# Altium PCB bottom_board.PcbDoc
Units mm, origin at the board's own origin, x right, y up, seen from the top; angles counter-clockwise.
Board outline 109 x 70 mm, 4 copper layers (Top Layer, +12V, -12V, Bottom Layer), stack 0.603 mm thick; 56 components, 37 nets, 188 pads, 33 vias.
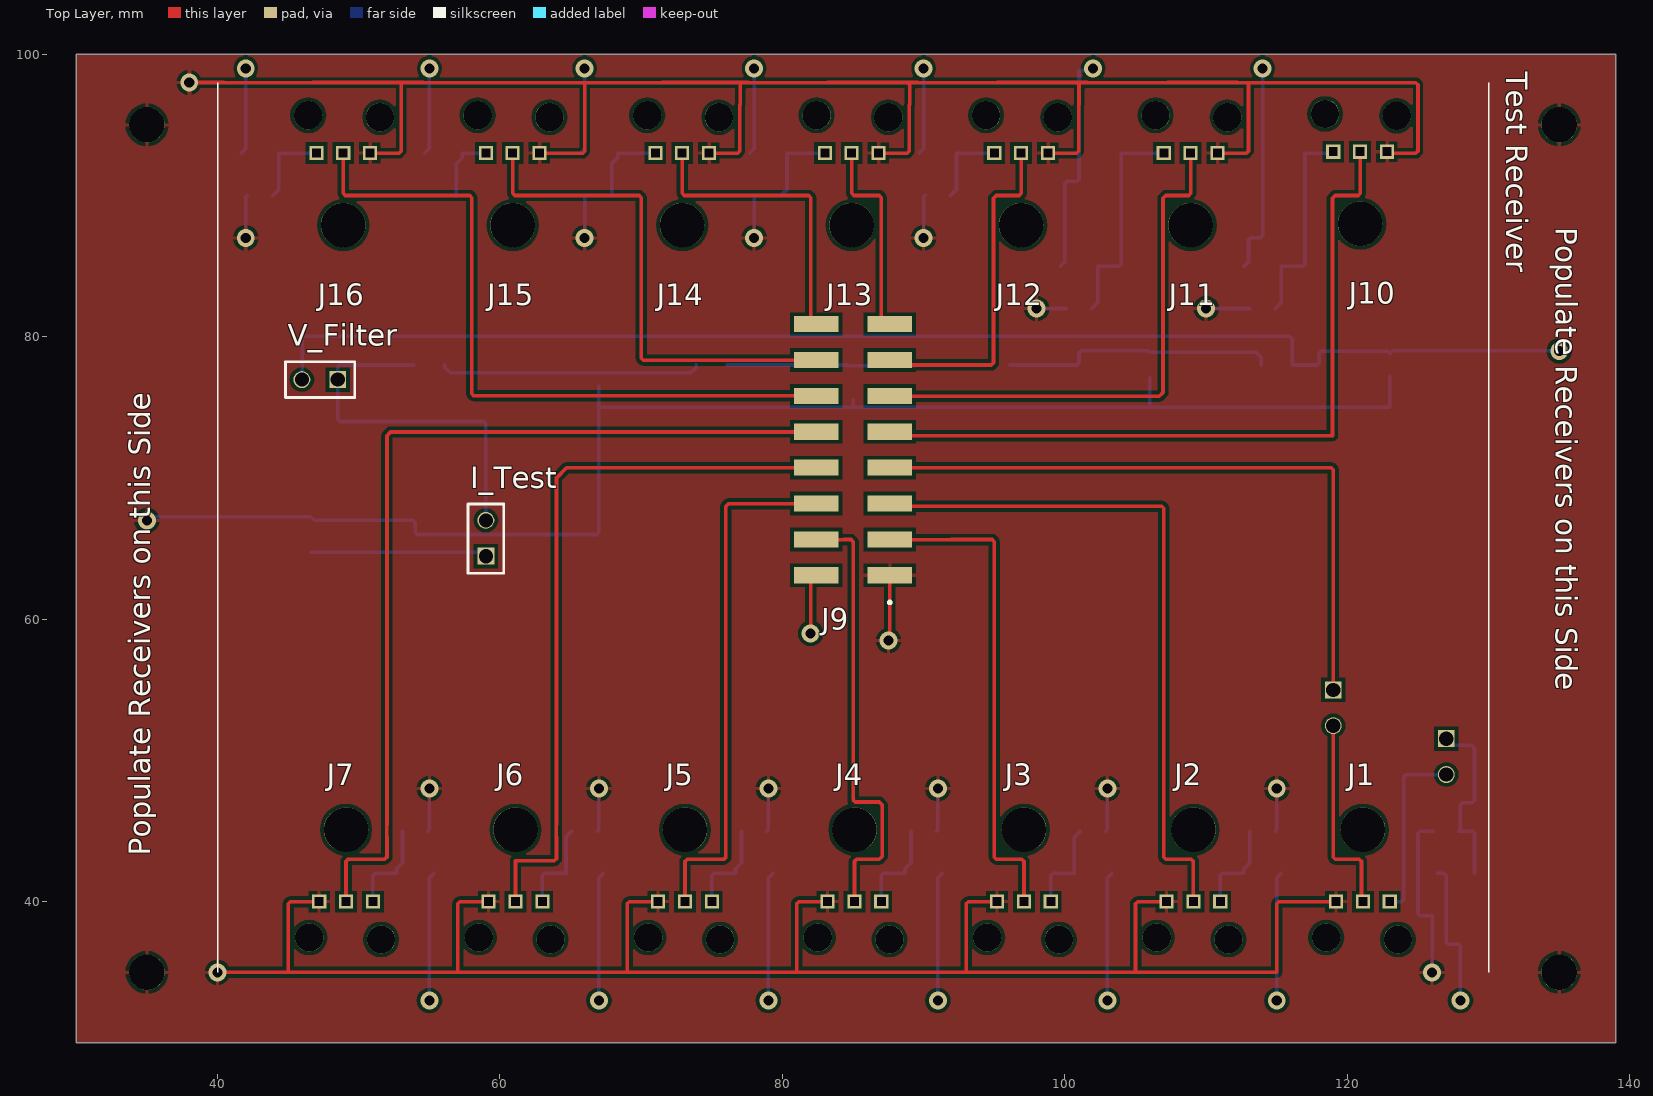
[diagram p0: Top Layer view]
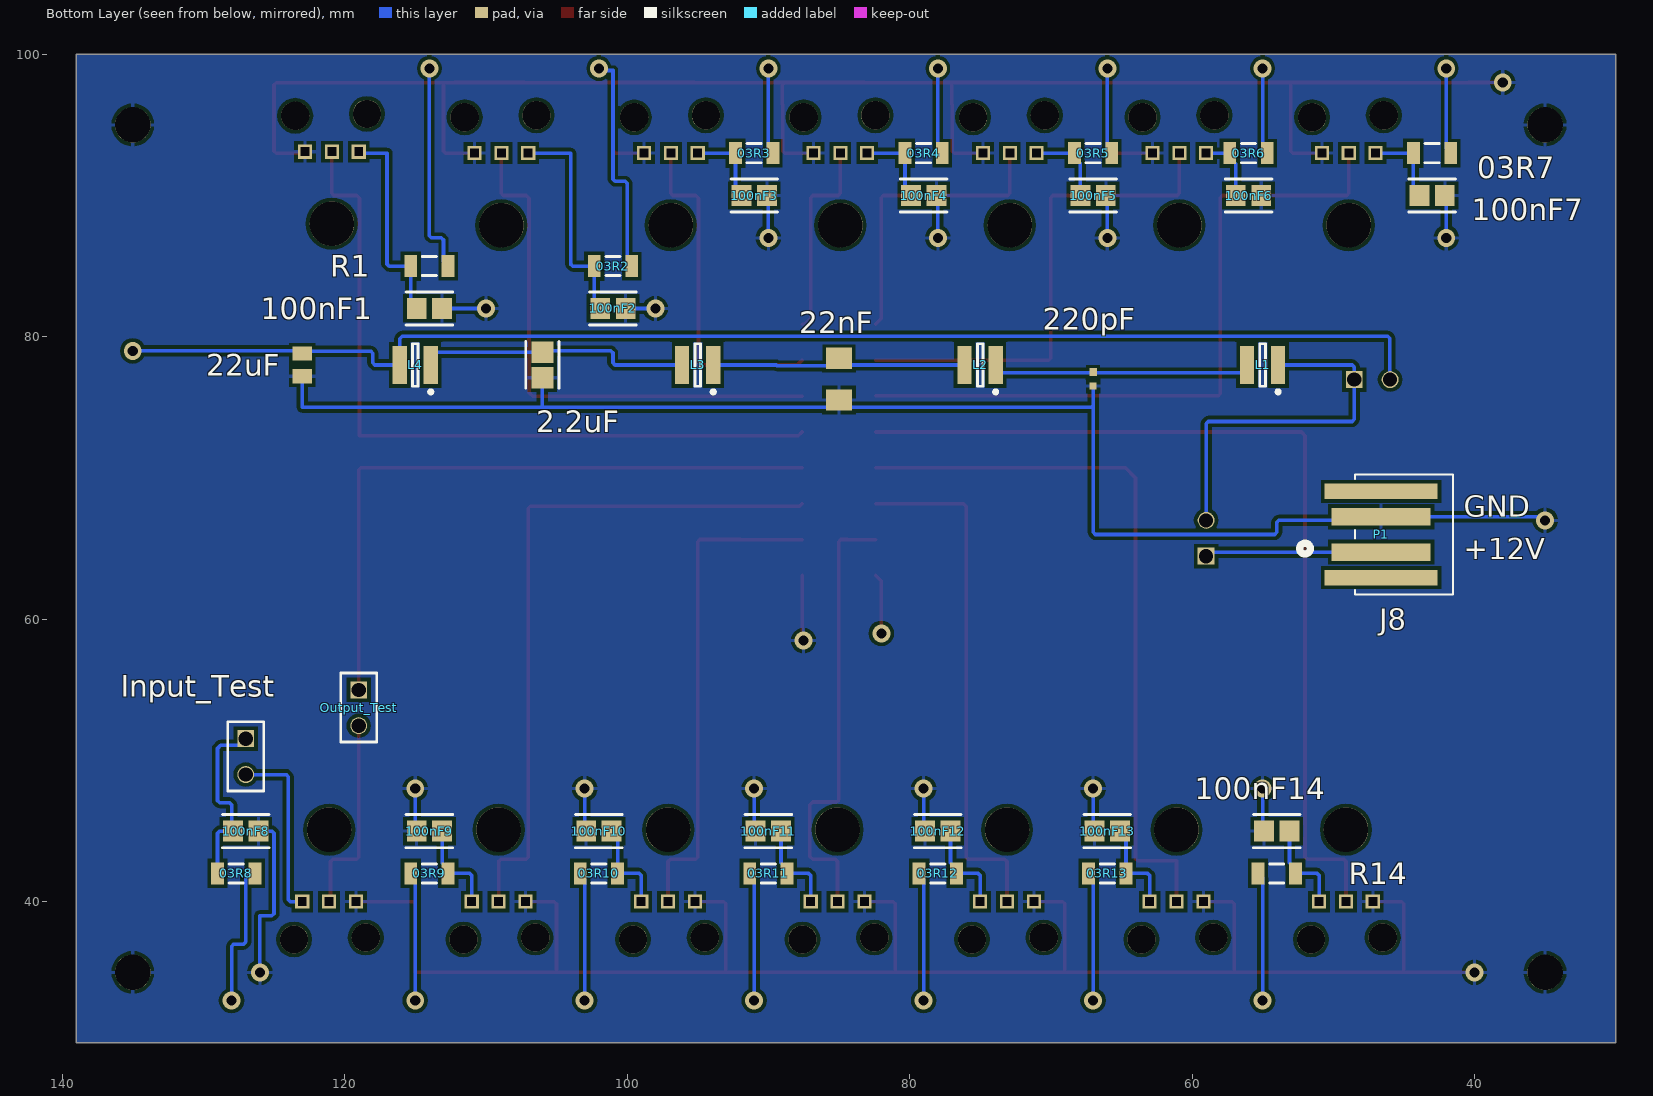
[diagram p1: Bottom Layer view, seen from below]
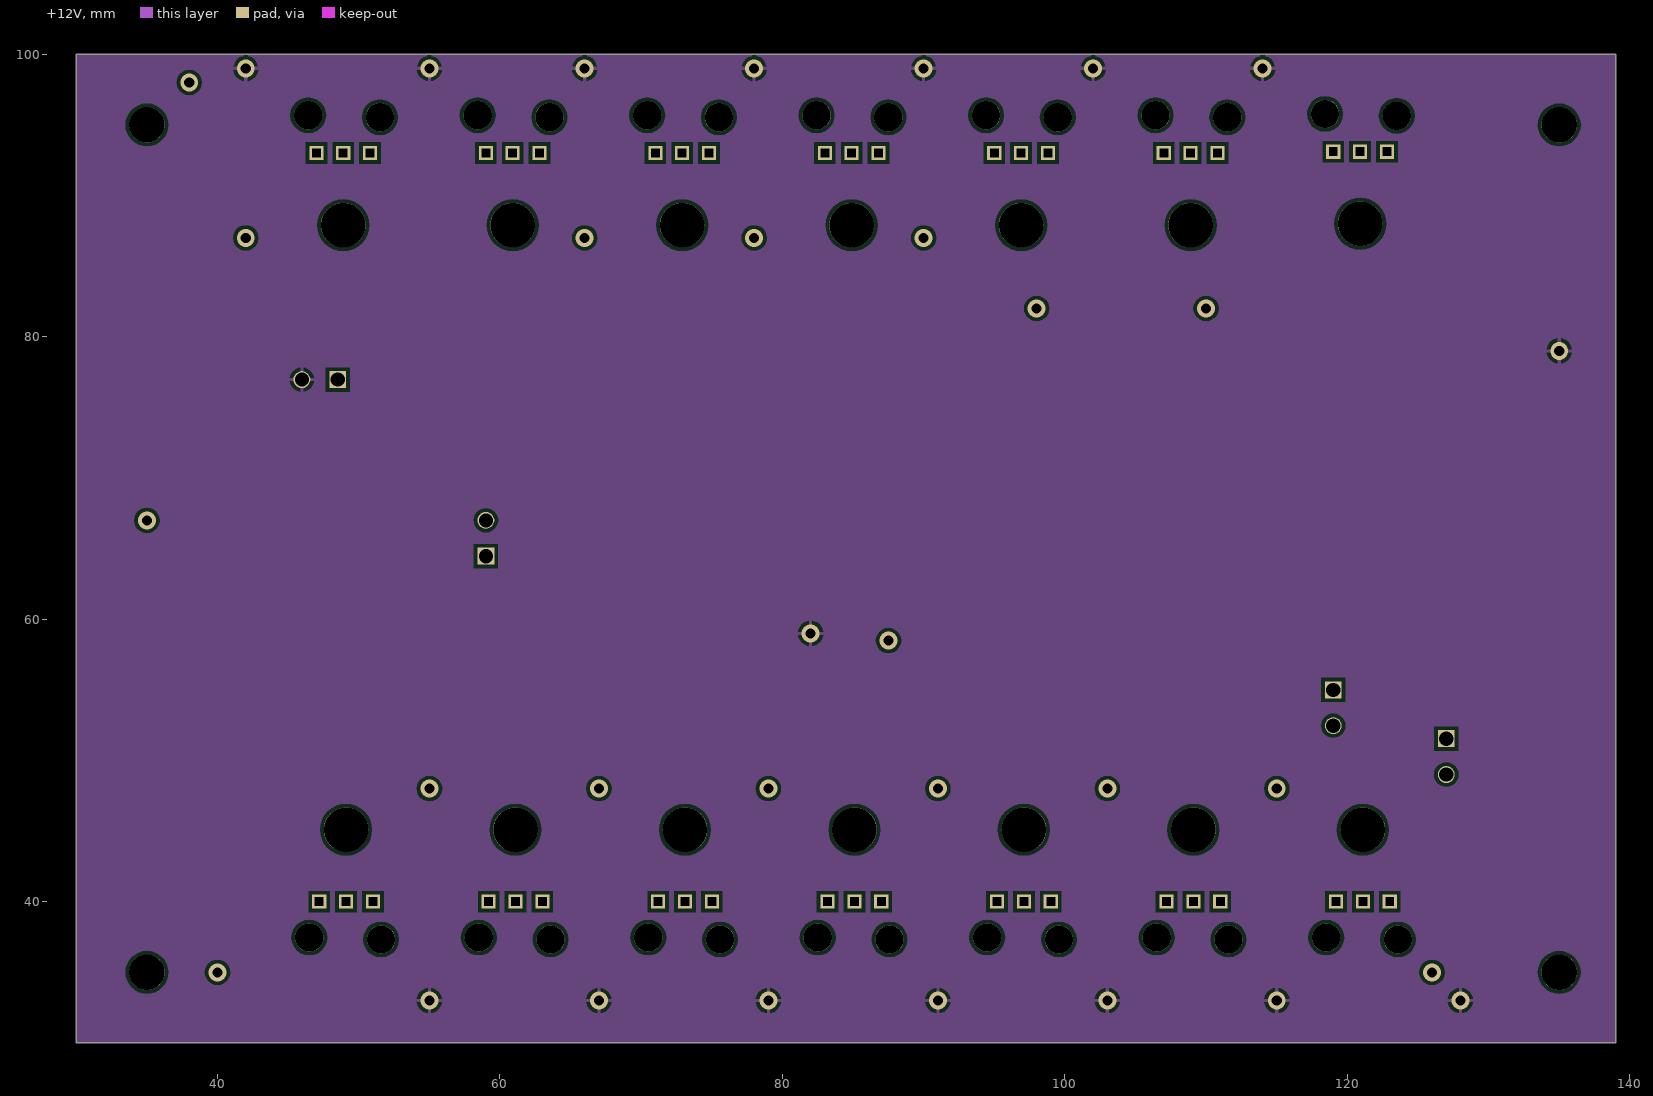
[diagram p2: +12V]
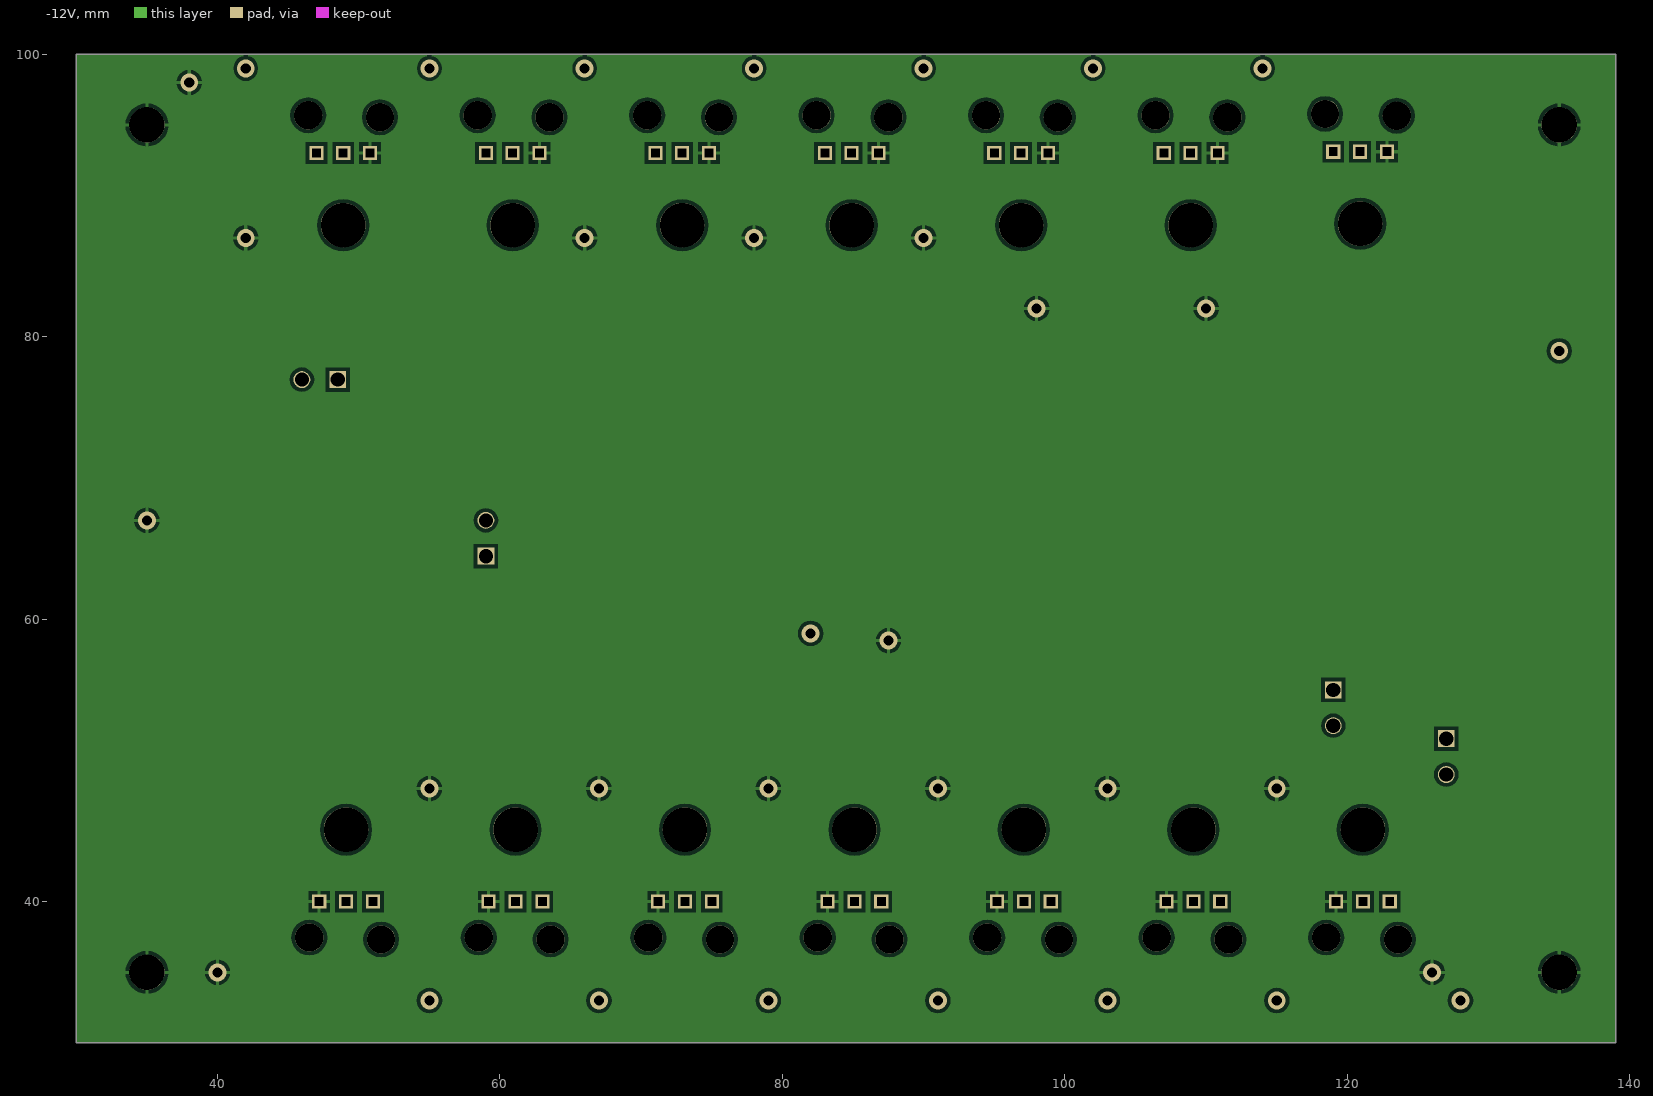
[diagram p3: -12V]
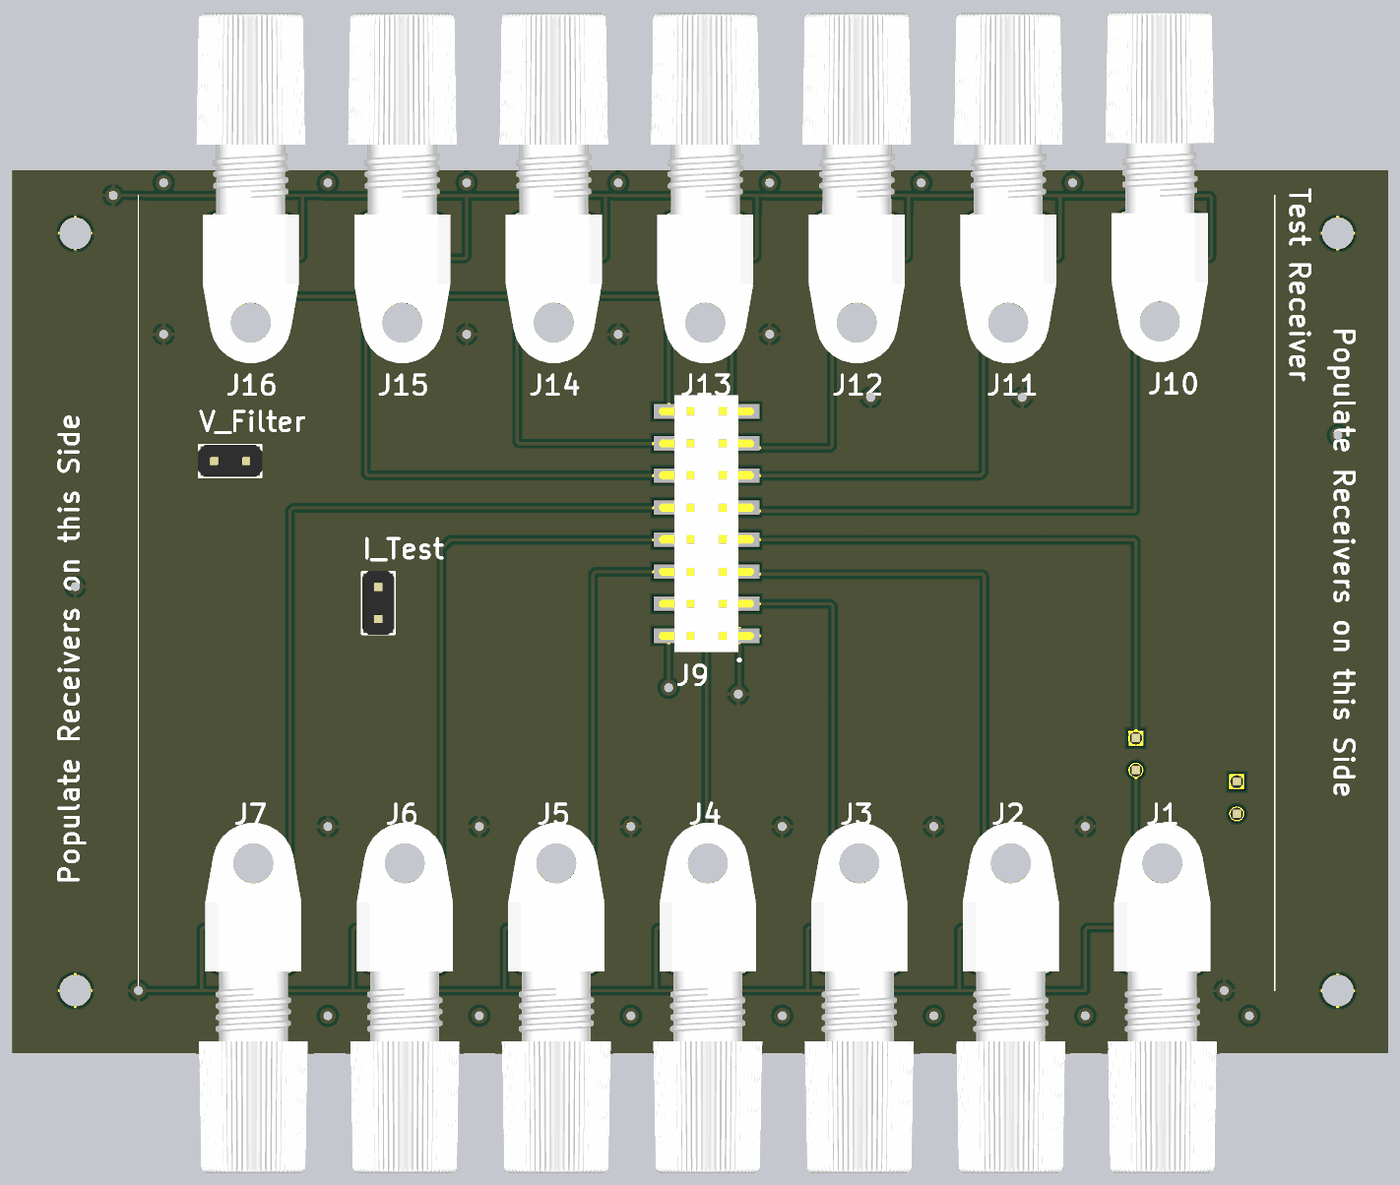
[diagram p4: 3D render of the assembled board from above, using the file's embedded part models]

## Layer stack, top to bottom
Top Solder: solder mask 0.0102, Solder Resist, Dk 3.5
Top Layer: signal copper 0.035
Dielectric 2: prepreg 0.0711, PP-006, Dk 4.1
+12V: signal copper 0.0356
Dielectric 1: dielectric 0.32, FR-4, Dk 4.8
-12V: signal copper 0.0356
Dielectric 3: prepreg 0.0711, PP-006, Dk 4.1
Bottom Layer: signal copper 0.035
Bottom Solder: solder mask 0.0102, Solder Resist, Dk 3.5

## Board outline
30,30 30,100 139,100 139,30

## Design rules (kind name [scope] priority, off if disabled: settings)
Clearance [All] p1: gap=0.254 ignorepadtopadclearanceinfootprint=FALSE except(0: Arc-Hole Track-Hole SMDPad-Hole THPad-Hole Via-Hole Fill-Hole Poly-Hole Region-Hole Text-Hole)
HoleSize [All] p1: absolutevalues=TRUE maxlimit=4 minlimit=0.025 maxpercent=80.000 minpercent=20.000
PolygonConnect [All] p1: connectstyle=Relief reliefconductorwidth=0.254 reliefentries=4 polygonreliefangle="90 Angle" airgapwidth=0.254
RoomDefinition bot_schem [InComponentClass('bot_schem')] p1: confinementstyle=ConfineIn formatcopy=TRUE lockcomponents=FALSE outline 30,17 139,17 139,117 30,117
RoutingVias [All] p1: holewidth=0.711 width=1.27 viastyle="Through Hole" minholewidth=0.711 minwidth=1.27 maxholewidth=0.711 maxwidth=1.27
SolderMaskExpansion [All] p1: expansion=0.102 istentingtop=FALSE
Width [All] p1: maxlimit=0.254 minlimit=0.254 preferedwidth=0.254
29 further rules are at their usual default settings.

## Components (designator, comment, footprint, x,y, rotation, side; value= is the part's Value field where it differs from the comment)
2.2uF "C0805C223K5RACTU" 22nF#1 106,78 r270 bottom
03R2 "ERJ-2BQJR30X" "03 Ohm" 101,85 r0 bottom
03R3 "ERJ-2BQJR30X" "03 Ohm" 91,93 r0 bottom
03R4 "ERJ-2BQJR30X" "03 Ohm" 79,93 r0 bottom
03R5 "ERJ-2BQJR30X" "03 Ohm" 67,93 r0 bottom
03R6 "ERJ-2BQJR30X" "03 Ohm" 56,93 r0 bottom
03R7 "ERJ-2BQJR30X" "03 Ohm" 43,93 r0 bottom
03R8 "ERJ-2BQJR30X" "03 Ohm" 127.675,42 r0 bottom
03R9 "ERJ-2BQJR30X" "03 Ohm" 114,42 r180 bottom
03R10 "ERJ-2BQJR30X" "03 Ohm" 102,42 r180 bottom
03R11 "ERJ-2BQJR30X" "03 Ohm" 90,42 r180 bottom
03R12 "ERJ-2BQJR30X" "03 Ohm" 78,42 r180 bottom
03R13 "ERJ-2BQJR30X" "03 Ohm" 66,42 r180 bottom
22nF "GRM3195C1H223JA01" 22nF#2 85,77 r270 bottom
22uF "C0805C226M9PACTU" 22uF 123,78 r270 bottom
100nF1 "C0805C104K5RACTU" 100nF 114,82 r0 bottom
100nF2 "C0805C104K5RACTU" 100nF 101,82 r0 bottom
100nF3 "C0805C104K5RACTU" 100nF 91,90 r0 bottom
100nF4 "C0805C104K5RACTU" 100nF 79,90 r0 bottom
100nF5 "C0805C104K5RACTU" 100nF 67,90 r0 bottom
100nF6 "C0805C104K5RACTU" 100nF 56,90 r0 bottom
100nF7 "C0805C104K5RACTU" 100nF 43,90 r0 bottom
100nF8 "C0805C104K5RACTU" 100nF 127,45 r180 bottom
100nF9 "C0805C104K5RACTU" 100nF 114,45 r0 bottom
100nF10 "C0805C104K5RACTU" 100nF 102,45 r0 bottom
100nF11 "C0805C104K5RACTU" 100nF 90,45 r0 bottom
100nF12 "C0805C104K5RACTU" 100nF 78,45 r0 bottom
100nF13 "C0805C104K5RACTU" 100nF 66,45 r0 bottom
100nF14 "C0805C104K5RACTU" 100nF 54,45 r0 bottom
220pF "GRM1555C1H221JA01" 220pF 67,77 r270 bottom
I_Test "PRPC001DFAN-RC" PRPC001DFAN-RC 59,64.46 r90 top
Input_Test "PRPC001DFAN-RC" PRPC001DFAN-RC 127,51.54 r270 bottom
J1 "IF-D95T" IF-D95 123,40 r180 top
J2 "IF-D95T" IF-D95 111,40 r180 top
J3 "IF-D95T" IF-D95 99,40 r180 top
J4 "IF-D95T" IF-D95 87,40 r180 top
J5 "IF-D95T" IF-D95 75,40 r180 top
J6 "IF-D95T" IF-D95 63,40 r180 top
J7 "IF-D95T" IF-D95 51,40 r180 top
J9 "HW-08-11-F-D-511-SM" "16 pin receiver" 85,72 r90 top
J10 "IF-D95T" IF-D95 119,93.1 r0 top
J11 "IF-D95T" IF-D95 107,93 r0 top
J12 "IF-D95T" IF-D95 95,93 r0 top
J13 "IF-D95T" IF-D95 83,93 r0 top
J14 "IF-D95T" IF-D95 71,93 r0 top
J15 "IF-D95T" IF-D95 59,93 r0 top
J16 "IF-D95T" IF-D95 47,93 r0 top
L1 "SRN3015-1R0Y" 1uH 55,78 r0 bottom
L2 "SRN3015-1R0Y" 1uH 75,78 r0 bottom
L3 "SRN3015-1R0Y" 1uH 95,78 r0 bottom
L4 "SRN3015-1R0Y" 1uH 115,78 r0 bottom
Output_Test "PRPC001DFAN-RC" PRPC001DFAN-RC 119,55 r270 bottom
P1 "1054311102" CONN_1054311102_MOL 45,66 r270 bottom
R1 "ERJ-2BQJR30X" "03 Ohm" 114,85 r0 bottom
R14 "ERJ-2BQJR30X" "03 Ohm" 54,42 r180 bottom
V_Filter "PRPC001DFAN-RC" PRPC001DFAN-RC 48.514,76.962 r180 top (schematic designator V_Filter?)

## Footprints (in the part's own frame and the unit in brackets; to place one, negate y for a bottom-side part, rotate by r counter-clockwise, add the part's x,y. Pads: shape width x height; smd on the part's side, far side on the other; paste and mask are expansions set on the pad)
1uH [mm]
  rect 1x2.7 smd: 1(-1.1,0) 2(1.1,0)
  silkscreen extent -1.22,-1.5 0.2,2.02, body extent -1.5,-1.5 1.5,1.5, height 1.5
"03 Ohm" [mm]
  rect 0.9x1.55 smd: 1(-1.325,0) 2(1.325,0)
  silkscreen extent -0.5,-0.67 0.5,0.67, body extent -1.63,-0.82 1.62,0.82, height 0.7
"16 pin receiver" [mm]
  rect 1.14x3.175 smd: 01(-8.89,-2.602) 02(-8.89,2.603) 03(-6.35,-2.602) 04(-6.35,2.603) 05(-3.81,-2.602) 06(-3.81,2.603) 07(-1.27,-2.602) 08(-1.27,2.603) 09(1.27,-2.602) 10(1.27,2.603) 11(3.81,-2.602) 12(3.81,2.603) 13(6.35,-2.602) 14(6.35,2.603) 15(8.89,-2.602) 16(8.89,2.603)
  silkscreen extent -10.91,-2.7 -10.71,-2.5, body extent -10.16,-3.75 10.16,3.75, height 21.98
22nF#1 [mm]
  rect 1.505x1.556 smd paste+0 mask+0: 1(-0.901,0) 2(0.901,0)
  silkscreen extent -1.65,-1.18 1.65,1.18, body extent -1,-0.63 1,0.62, height 0.88
22nF#2 [mm]
  rect 1.506x1.858 smd paste+0 mask+0: 1(-1.476,0) 2(1.476,0)
  body extent -1.6,-0.8 1.6,0.8, height 0.95
22uF [mm]
  rect 1x1.35 smd: 1(-0.8,0) 2(0.8,0)
  body extent -1.1,-0.72 1.1,0.72, height 1.45
100nF [mil]
  rect 55x58 smd paste+0 mask+0: 1(-35.46,0) 2(35.46,0)
  silkscreen extent -65,-46 65,46, body extent -39,-25 39,25, height 35
220pF [mm]
  rect 0.56x0.52 smd: 1(-0.5,0)
  rect 0.5x0.5 smd: 2(0.5,0)
  body extent -0.53,-0.28 0.53,0.28, height 0.55
CONN_1054311102_MOL [mil]
  rect 49x276 smd paste+0 mask+0: 1(49.21,-63.38) 2(-49.21,-63.38)
  rect 43x315 smd: 3(-120.28,-63.38) 4(120.28,-63.38)
  silkscreen extent -167,-137 167,137, body extent -162,-254 162,71, height 440
IF-D95 [mm]
  rect 1x1 hole 0.6 square: 1(0,0) 2(1.9,0) 3(3.8,0)
  round 2 hole 2: 4(-0.58,2.675) 4(4.5,2.54)
  round 3.15 hole 3.15: 4(1.9,-5.1)
  body extent -2.42,-8.3 6.22,19.44, height 11.3
PRPC001DFAN-RC [mm]
  rect 1.2x1.2 hole 1: 1(0,0)
  round 1.2 hole 1: 2(2.54,0)
  silkscreen extent -1.2,-1.27 3.7,1.27, body extent -1.29,-1.27 3.79,1.27, height 10.17

## Part data
2.2uF: "KEMET - C0805C223K5RACTU - CAP, MLCC, X7R, 22NF, 50V, 0805", Capacitance=22nF, Case Code (Imperial)=0805, Case Code (Metric)=2012, Dielectric=X7R, Dielectric Material=Ceramic, Manufacturer=KEMET, Max Operating Temperature=125°C, Min Operating Temperature=-55°C, Supplier Part Number 1=399-1163-1-ND, Tolerance=10%, Voltage=50V, Case/Package=0805, Category="Ceramic Capacitors", ComponentLink1Description=https://datasheet.ciiva.com/18193/getdatasheetpartid-385695-18193669.pdf?src-supplier=Verical, ComponentLink1URL=https://datasheet.ciiva.com/18193/getdatasheetpartid-385695-18193669.pdf?src-supplier=Verical, Construction=Flat, Depth=1.25mm, Height=0.78mm, Length=2mm, Manufacturer Part Number=C0805C223K5RACTU, Mount="Surface Mount,PCB", Packaging="Tape and Reel", Pricing 1="1=0.10000, 10=0.05200, 50=0.02840, 100=0.02320, 500=0.01656, 1000=0.01301 (USD)", Radiation Hardening=No, REACH SVHC="No SVHC", RoHS=Yes, RoHS Compliant=Yes, Series=C0805C, Stock 1=179680, Supplier 1=Digi-Key, Termination=SMD/SMT, Voltage Rating=50V, Voltage Rating (DC)=50V, Weight=0.000194oz, Width=1.2mm
03R2 03R3 03R4 03R5 03R6 03R7 03R8 03R9 03R10 03R11 03R12 03R13 R1 R14: "RES 0.3 OHM 5% 1/6W 0402", Case Code (Imperial)=0402, Case Code (Metric)=1005, Manufacturer=Panasonic, Max Operating Temperature=125°C, Max Power Dissipation=167mW, Min Operating Temperature=-55°C, Resistance=300mR, Resistor Type="Thick Film", Supplier Part Number 1=P17347CT-ND, Temperature Coefficient=250ppm/°C, Tolerance=5%, Case/Package=0402, Category="Chip SMD Resistors", ComponentLink1Description=http://www.mouser.com/ds/2/315/AOA0000C295-1109214.pdf?src-supplier=Mouser, ComponentLink1URL=http://www.mouser.com/ds/2/315/AOA0000C295-1109214.pdf?src-supplier=Mouser, ComponentLink2Description=https://industrial.panasonic.com/cdbs/www-data/pdf/RDN0000/AOA0000C313.pdf?src-supplier=Digi-Key, ComponentLink2URL=https://industrial.panasonic.com/cdbs/www-data/pdf/RDN0000/AOA0000C313.pdf?src-supplier=Digi-Key, Features="Automotive AEC-Q200", Height=0.016inch, Length=0.039inch, Manufacturer Part Number=ERJ-2BQJR30X, Number of Terminations=2, Packaging="Tape and Reel", Pricing 1="1=0.21000, 10=0.17600, 25=0.12800, 50=0.09280, 100=0.06880, 250=0.05280, 500=0.04160, 1000=0.02880, 5000=0.02400 (USD)", RoHS=Yes, Stock 1=18282, Supplier 1=Digi-Key, Width=0.02inch
22nF: "MURATA - GRM3195C1H223JA01 - CAP", Capacitance=22nF, Case Code (Imperial)=0805, Case Code (Metric)=2012, Dielectric=X7R, Dielectric Material=Ceramic, Manufacturer=KEMET, Manufacturer Part Number=C0805C223K5RACTU, Max Operating Temperature=125°C, Min Operating Temperature=-55°C, Supplier Part Number 1=490-1761-1-ND, Tolerance=10%, Voltage=50V, Case/Package=0805, Category="Ceramic Capacitors", ComponentLink1Description=https://datasheet.ciiva.com/18193/getdatasheetpartid-385695-18193669.pdf?src-supplier=Verical, ComponentLink1URL=https://datasheet.ciiva.com/18193/getdatasheetpartid-385695-18193669.pdf?src-supplier=Verical, Construction=Flat, Depth=1.25mm, Height=0.78mm, Length=2mm, Mount="Surface Mount,PCB", Packaging="Tape and Reel", Pricing 1="1=0.10000, 10=0.05200, 50=0.02840, 100=0.02320, 500=0.01656, 1000=0.01301 (USD)", Radiation Hardening=No, REACH SVHC="No SVHC", RoHS=Yes, RoHS Compliant=Yes, Series=C0805C, Stock 1=179680, Supplier 1=Digi-Key, Termination=SMD/SMT, Voltage Rating=50V, Voltage Rating (DC)=50V, Weight=0.000194oz, Width=1.2mm
22uF: "KEMET         C0805C226M9PACTU            CERAMIC CAPACITOR, 22UF, 6.3V, X5R, 20%, 0805, FULL REEL", Capacitance=22uF, Case Code (Imperial)=0805, Case Code (Metric)=2012, Dielectric=X5R, Dielectric Material=Ceramic, Manufacturer=KEMET, Max Operating Temperature=85°C, Min Operating Temperature=-55°C, Package Quantity=2500, Supplier Part Number 1=399-4696-1-ND, Tolerance=20%, Voltage=6.3V, Case/Package=0805, Category="Ceramic Capacitors", ComponentLink1Description=https://datasheet.ciiva.com/7842/40889-7842585.pdf?src-supplier=Element14, ComponentLink1URL=https://datasheet.ciiva.com/7842/40889-7842585.pdf?src-supplier=Element14, ComponentLink2Description=https://datasheet.ciiva.com/18193/getdatasheetpartid-344134-18193702.pdf?src-supplier=Verical, ComponentLink2URL=https://datasheet.ciiva.com/18193/getdatasheetpartid-344134-18193702.pdf?src-supplier=Verical, ComponentLink3Description=https://datasheet.ciiva.com/22748/1918694-22748303.pdf?src-supplier=Element14, ComponentLink3URL=https://datasheet.ciiva.com/22748/1918694-22748303.pdf?src-supplier=Element14, Construction=Flat, Depth=1.25mm, Dissipation Factor=5%, Height=1.25mm, Lead Free="Lead Free", Length=2mm, Manufacturer Part Number=C0805C226M9PACTU, Mount="Surface Mount,PCB", Number of Pins=2, Packaging="Tape and Reel", Pricing 1="1=0.21000, 10=0.14400, 50=0.08660, 100=0.07320, 500=0.05004, 1000=0.04428 (USD)", Radiation Hardening=No, REACH SVHC="No SVHC", RoHS=Yes, RoHS Compliant=Yes, Stock 1=337605, Supplier 1=Digi-Key, Termination=SMD/SMT, Voltage Rating=6.3V, Voltage Rating (DC)=6.3V, Width=1.2mm
100nF1 100nF2 100nF3 100nF4 100nF5 100nF6 100nF7 100nF8 100nF9 100nF10 100nF11 100nF12 100nF13 100nF14: "Cap Ceramic 0.1uF 50V X7R 10% SMD 2.0 x 1.2 mm 125 C Paper T/R", Capacitance=100nF, Case Code (Imperial)=0805, Case Code (Metric)=2012, Dielectric=X7R, Dielectric Material=Ceramic, Manufacturer=KEMET, Max Operating Temperature=125°C, Min Operating Temperature=-55°C, Package Quantity=4000, Supplier Part Number 1=399-1170-1-ND, Tolerance=10%, Voltage=500V, Voltage Rating=50V, Case/Package=0805, Category="Ceramic Capacitors", ComponentLink1Description=https://datasheet.ciiva.com/28682/1851736-28682232.pdf?src-supplier=Element14, ComponentLink1URL=https://datasheet.ciiva.com/28682/1851736-28682232.pdf?src-supplier=Element14, ComponentLink2Description=https://datasheet.ciiva.com/14589/70095383-14589048.pdf?src-supplier=Allied+Electronics, ComponentLink2URL=https://datasheet.ciiva.com/14589/70095383-14589048.pdf?src-supplier=Allied+Electronics, ComponentLink3Description=https://datasheet.ciiva.com/32431/slceramic-chip-condensers-e-32431755.pdf?src-supplier=Distrelec, ComponentLink3URL=https://datasheet.ciiva.com/32431/slceramic-chip-condensers-e-32431755.pdf?src-supplier=Distrelec, ComponentLink4Description=https://datasheet.ciiva.com/18410/70095383-18410815.pdf?src-supplier=Allied+Electronics, ComponentLink4URL=https://datasheet.ciiva.com/18410/70095383-18410815.pdf?src-supplier=Allied+Electronics, Construction=Flat, Contact Plating=Tin,Matte, Depth=1.25mm, Height=0.9mm, Lead Pitch=0.75mm, Length=2mm, Manufacturer Part Number=C0805C104K5RACTU, Mount="Surface Mount,PCB", Number of Pins=2, Packaging="Tape and Reel", Pricing 1="1=0.15000, 10=0.11000, 50=0.06220, 100=0.05150, 500=0.03612, 1000=0.02991 (USD)", Radiation Hardening=No, REACH SVHC="No SVHC", RoHS=Yes, RoHS Compliant=Yes, Series=C0805C, Stock 1=2447786, Supplier 1=Digi-Key, Termination=SMD/SMT, Thickness=0.035inch, Voltage Rating (DC)=50V, Width=1.2mm
220pF: "MURATA - 220 pF", Capacitance=220pF, Case Code (Imperial)=0402, Case Code (Metric)=1005, Dielectric=X7R, Dielectric Material=Ceramic, Manufacturer=KEMET, Manufacturer Part Number=C0402C221K5RACTU, Max Operating Temperature=125°C, Min Operating Temperature=-55°C, Package Quantity=1, Supplier Part Number 1=GRM1555C1H221JA01D, Tolerance=10%, Voltage=50V, Case/Package=0402, Category="Ceramic Capacitors", ComponentLink1Description=https://datasheet.ciiva.com/7747/1807957-7747493.pdf?src-supplier=Element14, ComponentLink1URL=https://datasheet.ciiva.com/7747/1807957-7747493.pdf?src-supplier=Element14, ComponentLink2Description=https://datasheet.ciiva.com/5969/kem-c1002-x7r-smd-5969768.pdf?src-supplier=Farnell, ComponentLink2URL=https://datasheet.ciiva.com/5969/kem-c1002-x7r-smd-5969768.pdf?src-supplier=Farnell, ComponentLink3Description=https://datasheet.ciiva.com/14609/70095383-14609163.pdf?src-supplier=Allied+Electronics, ComponentLink3URL=https://datasheet.ciiva.com/14609/70095383-14609163.pdf?src-supplier=Allied+Electronics, ComponentLink4Description=https://datasheet.ciiva.com/28645/1851736-28645422.pdf?src-supplier=Element14, ComponentLink4URL=https://datasheet.ciiva.com/28645/1851736-28645422.pdf?src-supplier=Element14, Construction=Flat, Contact Plating=Tin,Matte, Depth=0.5mm, Dissipation Factor=2.5%, Height=0.5mm, Lead Pitch=0.3mm, Length=1mm, Mount="Surface Mount,PCB", Number of Pins=2, Packaging="Tape and Reel", Pricing 1="1=0.10000, 10=0.03600, 50=0.01980, 100=0.01620, 500=0.01156, 1000=0.00908, 2500=0.00825, 5000=0.00759 (USD)", Radiation Hardening=No, REACH SVHC="No SVHC", RoHS=Yes, RoHS Compliant=Yes, Series=C, Stock 1=199654, Supplier 1=Avnet, Termination=SMD/SMT, Thickness=0.022inch, Voltage Rating=50V, Voltage Rating (DC)=50V, Weight=2.3E-05oz, Width=0.5mm
I_Test Input_Test Output_Test V_Filter: "Conn Header Vert 2POS", Color=Black, Manufacturer=Sullins, Package Quantity=1, Supplier Part Number 1=S2211EC-01-ND, Category=Connectors, ComponentLink1Description=https://datasheet.ciiva.com/741/xrxczzzdxxn-rc-11636-b-741404.pdf?src-supplier=Digi-Key, ComponentLink1URL=https://datasheet.ciiva.com/741/xrxczzzdxxn-rc-11636-b-741404.pdf?src-supplier=Digi-Key, Connector Type="Male Pin", Contact Mating Length=0.318inch, Contact Plating=Gold, Manufacturer Part Number=PRPC001DFAN-RC, Mount="Through Hole", Number of Positions=2, Number of Rows=2, Packaging=Bulk, Pricing 1="1=0.09000, 10=0.08300, 25=0.06160, 50=0.05280, 100=0.05110, 250=0.04404, 500=0.04226 (USD)", RoHS=Yes, Row Spacing=0.1inch, Stock 1=5964, Supplier 1=Digi-Key, Termination=Solder
J1 J2 J3 J4 J5 J6 J7 J10 J11 J12 J13 J14 J15 J16: "DETECTOR PHOTOLOGIC TTL/CMOS", Manufacturer="Industrial Fiber Optics", Operating Supply Current=6mA, Package Quantity=50, Supplier Part Number 1=FB123-ND, Category="Fiber Optic Cables", ComponentLink1Description=https://datasheet.ciiva.com/2106/ifd95-2106550.pdf?src-supplier=Digi-Key, ComponentLink1URL=https://datasheet.ciiva.com/2106/ifd95-2106550.pdf?src-supplier=Digi-Key, Data Rate=125Kbps, Lead Free="Contains Lead", Manufacturer Part Number=IF-D95T, Rise Time=70ns, RoHS=No, Supplier 1=Digi-Key
J9: library part HW-08-11-F-D-507-SM, System=Connector
L1 L2 L3 L4: "INDUCTOR, POWER, 1UH, SEMI SHIELDED", Case/Package=1212, Current Rating=2.35A, DC Resistance (DCR)=48mR, Frequency=145MHz, Inductance=1uH, Inductance Tolerance=30%, Manufacturer=Bourns, Max Operating Temperature=125°C, Min Operating Temperature=-40°C, Package Quantity=2000, Resistor Type=Wirewound, Supplier Part Number 1=SRN3015-1R0YCT-ND, Test Frequency=1MHz, Category="Fixed Inductors", ComponentLink1Description=https://datasheet.ciiva.com/11802/0900766b80fe1f40-11802588.pdf?src-supplier=RSComponents, ComponentLink1URL=https://datasheet.ciiva.com/11802/0900766b80fe1f40-11802588.pdf?src-supplier=RSComponents, ComponentLink2Description=https://datasheet.ciiva.com/16940/70230774-16940935.pdf?src-supplier=Allied+Electronics, ComponentLink2URL=https://datasheet.ciiva.com/16940/70230774-16940935.pdf?src-supplier=Allied+Electronics, ComponentLink3Description=https://datasheet.ciiva.com/1048/srn3015-1048824.pdf?src-supplier=Digi-Key, ComponentLink3URL=https://datasheet.ciiva.com/1048/srn3015-1048824.pdf?src-supplier=Digi-Key, ComponentLink4Description=https://datasheet.ciiva.com/28678/1481208-28678232.pdf?src-supplier=Element14, ComponentLink4URL=https://datasheet.ciiva.com/28678/1481208-28678232.pdf?src-supplier=Element14, ComponentLink5Description=https://datasheet.ciiva.com/30197/587srn3015-30197944.pdf?src-supplier=Onlinecomponents.com, ComponentLink5URL=https://datasheet.ciiva.com/30197/587srn3015-30197944.pdf?src-supplier=Onlinecomponents.com, ComponentLink6Description=https://datasheet.ciiva.com/1048/srn3015-1048825.pdf?src-supplier=Digi-Key, ComponentLink6URL=https://datasheet.ciiva.com/1048/srn3015-1048825.pdf?src-supplier=Digi-Key, ComponentLink7Description=https://datasheet.ciiva.com/1048/srn3015-1048826.pdf?src-supplier=Digi-Key, ComponentLink7URL=https://datasheet.ciiva.com/1048/srn3015-1048826.pdf?src-supplier=Digi-Key, ComponentLink8Description=https://datasheet.ciiva.com/17284/srn3015-17284732.pdf?src-supplier=Avnet+Europe, ComponentLink8URL=https://datasheet.ciiva.com/17284/srn3015-17284732.pdf?src-supplier=Avnet+Europe, ComponentLink9Description=https://datasheet.ciiva.com/8517/srn3015-8517694.pdf?src-supplier=Avnet, ComponentLink9URL=https://datasheet.ciiva.com/8517/srn3015-8517694.pdf?src-supplier=Avnet, ComponentLink10Description=https://datasheet.ciiva.com/5986/srn3015-5986175.pdf?src-supplier=Farnell, ComponentLink10URL=https://datasheet.ciiva.com/5986/srn3015-5986175.pdf?src-supplier=Farnell, ComponentLink11Description=https://datasheet.ciiva.com/7847/srn3015-7847903.pdf?src-supplier=Element14, ComponentLink11URL=https://datasheet.ciiva.com/7847/srn3015-7847903.pdf?src-supplier=Element14, Contact Plating=Tin, Core Material=Ferrite, DC Current=2.35A, Depth=3.1mm, Height=1.5mm, Height - Seated (Max)=0.059inch, Length=3mm, Manufacturer Part Number=SRN3015-1R0Y, Material=Steel, Max DC Current=2.35A, Military Standard=Not, Number of Pins=2, Packaging="Tape and Reel", Pricing 1="1=0.46000, 10=0.40400, 25=0.37520, 50=0.31760, 100=0.28880, 250=0.27144, 500=0.24256, 1000=0.19635 (USD)", REACH SVHC="No SVHC", RMS Current (Irms)=2.35A, RoHS=Yes, RoHS Compliant=Yes, Sample Rate (Hz)=1MHz, Saturation Current=2.35A, Self Resonant Frequency=145MHz, Series=SRN3015, Shielding=Shielded, Stock 1=8610, Supplier 1=Digi-Key, Termination=SMD/SMT, Tolerance=30%, Weight=0.001235oz, Width=3mm
P1: "Nano-Fit Vertical Header, Surface Mount, 2.50mm Pitch, Single Row, 2 Circuits, 0.76 u00B5m Tin (Sn) Plating, Black,...", Manufacturer=Molex, Supplier Part Number 1=WM26073CT-ND, Category=Connectors, Manufacturer Part Number=1054311102, Pricing 1="1=2.05000, 10=1.85700, 100=1.59160 (USD)", RoHS=No, Stock 1=1192, Supplier 1=Digi-Key

## Free pads (board coordinates)
  round 2.5 hole 2.5: 1(35,35) 1(35,95) 1(135,35) 1(135,95)

## Via types
v1: diameter 1.27, hole 0.711, Top Layer to Bottom Layer, tented both sides, 33 vias

## Nets (pads, with @x,y where several pads share a name; then routed paths per layer and width w, separated by ;. In a path a pad name is that pad's centre, name@x,y a point inside that pad or via, vN(x,y) a via of type N, cw(c..) or ccw(c..) an arc to the next point about the centre after c; other vN are vias at no path point)
+12V: 03R2.1 03R3.1 03R4.1 03R5.1 03R6.1 03R7.1 03R8.1 03R9.1 03R10.1 03R11.1 03R12.1 03R13.1 22uF.1 J9.02 L4.2 R1.1 R14.1 V_Filter.2 | length 226
  Top Layer w0.254: v1(82,59) 82,62.707 J9.02@82.388,63.095
  Bottom Layer w0.254: 03R7.1 41.998,93.323 v1(42,99) v1(42,99) ; V_Filter.2 46,76.988 46,79.885 46.149,80.034 115.917,80.034 116.1,79.851 L4.2 117.851,78 118,78.149 118,78.835 118.149,78.984 122.816,78.984 22uF.1 123.2,79 v1(135,79) ; 03R6.1 54.998,93.323 54.998,98.998 v1(55,99) ; v1(55,33) 55.002,33.002 55.002,41.677 R14.1 ; 03R5.1 65.998,93.323 65.998,96.088 66,96.09 v1(66,99) ; v1(67,33) 67,41.675 03R13.1 ; 03R4.1 77.998,93.323 77.998,98.998 v1(78,99) ; v1(79,33) 79.002,33.002 79.002,41.677 03R12.1 ; 03R3.1 89.998,93.323 89.998,94.588 90,94.59 v1(90,99) ; v1(91,33) 91.002,33.002 91.002,41.677 03R11.1 ; 03R2.1 99.984,85.309 99.984,90.851 100.133,91 100.851,91 101,91.149 101,98.851 101.851,98.851 v1(102,99) ; v1(103,33) 103.002,33.002 103.002,41.677 03R10.1 ; R1.1 112.998,85.323 112.998,86.849 113.149,87 113.851,87 114,87.149 v1(114,99) v1@113.922,98.922 ; v1(115,33) 115.002,33.002 115.002,41.677 03R9.1 ; 03R8.1 126.851,42 127,41.851 127,37.149 127.149,37 127.851,37 128,36.851 v1(128,33) v1@127.998,33.002
+12V1: 100nF1.2 J10.1 R1.2 | length 14.8
  Bottom Layer w0.254: 100nF1.2 115.325,82.424 R1.2 116.851,85 117,85.149 117,93 118.9,93 J10.1
+12V2: 03R2.2 100nF2.2 J11.1 | length 15.8
  Bottom Layer w0.254: 100nF2.2 102.325,82.424 03R2.2 103.851,85 104,85.149 104,93 J11.1
+12V3: 03R3.2 100nF3.2 J12.1 | length 5.9
  Bottom Layer w0.254: 100nF3.2 92.325,90.424 03R3.2 J12.1
+12V4: 03R4.2 100nF4.2 J13.1 | length 5.9
  Bottom Layer w0.254: 100nF4.2 80.325,90.424 03R4.2 J13.1
+12V5: 03R5.2 100nF5.2 J14.1 | length 5.9
  Bottom Layer w0.254: 100nF5.2 67.901,92.251 68.325,92.675 03R5.2 J14.1
+12V6: 03R6.2 100nF6.2 J15.1 | length 4.9
  Bottom Layer w0.254: 100nF6.2 56.901,92.251 57.325,92.675 03R6.2 J15.1
+12V7: 03R7.2 100nF7.2 J16.1 | length 5.9
  Bottom Layer w0.254: 100nF7.2 44.325,90.424 03R7.2 J16.1
+12V8: 03R8.2 100nF8.1 Input_Test.1 | length 13
  Bottom Layer w0.254: Input_Test.1 127.473,51.067 128.784,51.067 129,50.851 129,47.149 128.851,47 128.149,47 128,46.851 128,45.099 100nF8.1 128.851,45 129,44.851 03R8.2
+12V8_Test: Input_Test.2 J1.1 | length 12.8
  Bottom Layer w0.254: J1.1 123.851,40 124,40.149 124,48.851 124.149,49 Input_Test.2
+12V9: 03R9.2 100nF9.1 J2.1 | length 6.8
  Bottom Layer w0.254: J2.1 111,41.851 111.149,42 03R9.2 112.675,42.325 113.099,42.749 100nF9.1
+12V10: 03R10.2 100nF10.1 J3.1 | length 6.8
  Bottom Layer w0.254: J3.1 99,41.851 99.149,42 03R10.2 100.675,44.576 100nF10.1
+12V11: 03R11.2 100nF11.1 J4.1 | length 6.8
  Bottom Layer w0.254: J4.1 87,41.851 87.149,42 03R11.2 88.675,42.325 89.099,42.749 100nF11.1
+12V12: 03R12.2 100nF12.1 J5.1 | length 6.8
  Bottom Layer w0.254: J5.1 75,41.851 75.149,42 03R12.2 76.675,42.325 77.099,42.749 100nF12.1
+12V13: 03R13.2 100nF13.1 J6.1 | length 6.8
  Bottom Layer w0.254: J6.1 63,41.851 63.149,42 03R13.2 64.675,44.576 100nF13.1
+12V14: 100nF14.1 J7.1 R14.2 | length 6.8
  Bottom Layer w0.254: J7.1 51,41.851 51.149,42 R14.2 52.675,42.325 53.099,42.749 100nF14.1
+Line1: I_Test.2 L1.1 V_Filter.1 | length 26.6
  Bottom Layer w0.254: L1.1 48.663,78 48.514,77.851 48.514,74.149 48.663,74 58.851,74 59,73.851 I_Test.2
+Line2: 220pF.1 L1.2 L2.1 | length 18.5
  Bottom Layer w0.254: L1.2 56.1,77.823 56.473,77.45 73.527,77.45 73.9,77.823 L2.1
+Line3: 22nF.1 L2.2 L3.1 | length 17.8
  Bottom Layer w0.254: L2.2 84.625,78 84.677,77.948 89.399,77.948 89.451,78 L3.1
+Line4: 2.2uF.1 L3.2 L4.1 | length 19.3
  Bottom Layer w0.254: L3.2 100.851,78 101,78.149 101,78.851 101.149,79 105.901,79 2.2uF.1 113.527,78.901 113.9,78.528 L4.1
CurrentTest: I_Test.1 P1.1 | length 12.5
  Bottom Layer w0.254: P1.1 58.71,64.75 I_Test.1
DIG12_TestVoltage: J1.2 Output_Test.2 | length 14.3
  Top Layer w0.254: Output_Test.2 119,43.149 119.149,43 120.851,43 121,42.851 121,40.1 J1.2
DIG_1: J4.2 J9.04 | length 31.8
  Top Layer w0.254: J9.04@82.397,65.635 84.356,65.635 84.362,65.641 84.851,65.641 85,65.492 85,47.205 85.149,47.056 86.851,47.056 87.056,46.851 87.056,43.205 86.851,43 85.249,43 85.1,42.851 J4.2
DIG_2: J5.2 J9.06 | length 37.2
  Top Layer w0.254: J5.2 73.1,42.851 73.249,43 75.563,43 75.579,43.016 75.867,43.016 76,43.149 76,44.563 75.984,44.579 75.984,45.421 76,45.437 76,68 76.175,68.175 J9.06@82.397,68.175
DIG_3: J6.2 J9.08 | length 51.5
  Top Layer w0.254: J6.2 61.1,42.9 63.851,42.9 64,43.049 64,44.563 63.984,44.579 63.984,45.421 64,45.437 64,70 64.715,70.715 J9.08@82.388,70.715
DIG_4: J7.2 J9.10 | length 66.2
  Top Layer w0.254: J7.2 49.1,42.851 49.265,43.016 51.851,43.016 52,43.165 52,44.563 51.984,44.579 51.984,45.421 52,45.437 52,73 52.255,73.255 J9.10@82.397,73.255
DIG_5: J9.12 J16.2 | length 50.4
  Top Layer w0.254: J16.2 48.9,90.149 49.049,90 57.851,90 58,89.851 58,75.959 58.149,75.81 J9.12
DIG_6: J9.14 J15.2 | length 35.9
  Top Layer w0.254: J15.2 60.9,90.149 61.049,90 69.851,90 70,89.851 70,78.484 70.149,78.335 J9.14@82.397,78.335
DIG_7: J9.16 J14.2 | length 21.2
  Top Layer w0.254: J14.2 72.9,90.149 73.049,90 81.851,90 82,89.851 82,81.287 J9.16@82.388,80.899
DIG_8: J9.15 J13.2 | length 14.4
  Top Layer w0.254: J13.2 84.9,90.149 85.049,90 86.851,90 87,89.851 87,81.333 87.458,80.875 J9.15@87.593,80.875
DIG_9: J9.13 J12.2 | length 24.1
  Top Layer w0.254: J9.13@87.616,78.335 87.951,78 94.795,78 94.944,78.149 94.944,89.795 95.149,90 96.751,90 96.9,90.149 J12.2
DIG_10: J9.11 J11.2 | length 38.1
  Top Layer w0.254: J9.11@87.602,75.795 106.683,75.795 106.944,76.056 106.944,89.795 107.149,90 108.751,90 108.9,90.149 J11.2
DIG_11: J9.09 J10.2 | length 53.3
  Top Layer w0.254: J9.09@87.616,73.255 87.871,73 118.944,73 118.944,89.795 119.149,90 120.751,90 120.9,90.149 J10.2
DIG_12: J9.07 Output_Test.1 | length 47
  Top Layer w0.254: J9.07 118.851,70.73 119,70.581 Output_Test.1
DIG_13: J2.2 J9.05 | length 49.3
  Top Layer w0.254: J9.05@87.616,68.175 87.791,68 106.851,68 107,67.851 107,43.149 107.149,43 108.951,43 109.1,42.851 J2.2
DIG_14: J3.2 J9.03 | length 34.9
  Top Layer w0.254: J9.03@87.593,65.635 91.949,65.635 91.955,65.641 94.851,65.641 95,65.492 95,43.149 95.149,43 96.951,43 97.1,42.851 J3.2
GND: 2.2uF.2 22nF.2 22uF.2 100nF1.1 100nF2.1 100nF3.1 100nF4.1 100nF5.1 100nF6.1 100nF7.1 100nF8.2 100nF9.2 100nF10.2 100nF11.2 100nF12.2 100nF13.2 100nF14.2 220pF.2 J1.3 J2.3 J3.3 J4.3 J5.3 J6.3 J7.3 J9.01 J10.3 J11.3 J12.3 J13.3 J14.3 J15.3 J16.3 P1.2 pad.1 | length 421.2
  Top Layer w0.254: v1(38,98) 40.437,98 40.453,97.984 46.719,97.984 46.735,98 53,98 ; v1(40,35) 45,35 ; J7.3 45.149,40 45,39.851 45,35 ; J16.3 52.851,93 53,93.149 53,98 ; J6.3 57.149,40 57,39.851 57,35 ; J15.3 65.851,93 66,93.149 66,97.984 ; J5.3 69.149,40 69,39.851 69,35 ; J14.3 76.835,93 76.984,93.149 76.984,96.421 77,96.437 77,98 ; J4.3 81.149,40 81,39.851 81,35 ; J13.3 88.835,93 88.984,93.149 88.984,96.421 89,96.437 89,97.851 88.851,98 ; v1(87.509,58.484) 87.593,58.568 J9.01@87.593,63.11 ; J3.3 93.149,40 93,39.851 93,35 ; J12.3 100.835,93 100.984,93.149 100.984,96.421 101,96.437 101,97.851 100.851,98 ; J2.3 105.149,40 105,39.851 105,35 ; J11.3 112.851,93 113,93.149 113,97.984 ; J1.3 115.149,40 115,39.851 115,35 105,35 ; J10.3 122.9,93 124.851,93 125,93.149 125,97.835 124.851,97.984 113,97.984 ; 45,35 57,35 ; 53,98 54.563,98 54.579,97.984 66,97.984 ; 57,35 69,35 ; 66,97.984 71.492,97.984 71.508,98 77,98 ; 69,35 81,35 ; 77,98 77.563,98 77.579,97.984 83.207,97.984 83.223,98 88.851,98 ; 81,35 93,35 ; 88.851,98 89.563,98 89.579,97.984 95.207,97.984 95.223,98 100.851,98 ; 93,35 105,35 ; 100.851,98 101.563,98 101.579,97.984 107.282,97.984 107.298,98 112.202,98 112.218,97.984 113,97.984
  Bottom Layer w0.254: v1(35,67) 35.25,67.25 P1.2 46.86,67 53.851,67 54,66.851 54,66.149 54.149,66 66.851,66 67,66.149 67,75.149 ; v1(42,87) 42,89.901 100nF7.1 ; 100nF14.2 55,45.099 v1(55,48) ; v1(66,87) 66,89.901 100nF5.1 ; 100nF13.2 67,45.099 v1(67,48) ; 220pF.2 67,75.149 ; v1(78,87) 78,89.901 100nF4.1 ; 100nF12.2 79,45.099 v1(79,48) ; 22nF.2 22nF.2@85,75 ; v1(90,87) 90,89.901 100nF3.1 ; 100nF11.2 91,45.099 v1(91,48) ; v1(98,82) 100nF2.1 ; 100nF10.2 103,45.099 v1(103,48) ; 2.2uF.2 106,75 ; v1(110,82) 100nF1.1 ; 100nF9.2 115,45.099 v1(115,48) ; 22uF.2 123,75 106,75 ; v1(126,35) 126,39 125.149,39 125,39.149 125,44.851 125.149,45 100nF8.2 ; 67,75.149 67.149,75 22nF.2@85,75 ; 22nF.2@85,75 106,75
pads on no net: J1.4 J2.4 J3.4 J4.4 J5.4 J6.4 J7.4 J10.4 J11.4 J12.4 J13.4 J14.4 J15.4 J16.4 P1.3 P1.4

## Polygon pours and split planes (outlines as drawn)
GND on Bottom Layer "GND" (solid, pour order 3): 30,30 30,100 139,100 139,30
GND on Top Layer "GND" (solid, pour order 2): 30,30 30,100 139,100 139,30
+12V on +12V "+12V" (solid, pour order 1): 30,30 30,100 139,100 139,30
GND on -12V "-12V" (solid, pour order 0): 30,30 30,100 139,100 139,30

## Silkscreen, mask and mechanical layers (free items; w line width, h text height)
Top Overlay:
  lines w0.1: 40,35 40,98 ; 130,35 130,98
  text "Test Receiver" at 131.254,98.746 h1.52 r270
  text "Populate Receivers on this Side" at 134.762,87.746 h1.52 r270
  text "Populate Receivers on this Side" at 35.238,43.254 h1.52 r90
Bottom Overlay:
  circle w0.508: c52,65 r0.381
  text "GND" at 40.746,67.254 h1.5
  text "+12V" at 40.746,64.254 h1.5
  text "J8" at 46.746,59.254 h1.5
Mechanical 1:
  lines w0: 30,30 139,30 ; 30,30 30,100 ; 30,30 139,30 ; 30,30 30,100 ; 30,100 139,100 ; 30,100 139,100 ; 139,30 139,100 ; 139,30 139,100
Mechanical 0:
  the board outline again, w0

## Text inside footprints (layer, text, board x,y; h text height)
J9: Mechanical 30 "2.000" at 92.11,53.433 h0.39 r90; Mechanical 30 "2.000" at 87.729,52.861 h0.39 r90; Mechanical 30 "4.000" at 87.729,51.096 h0.39 r90; Mechanical 30 "14.000" at 93.19,62.31 h0.39 r90; Mechanical 30 "16.307" at 83.36,62.31 h0.39 r90; Mechanical 3 "1" at 87.238,53.141 h1.97 r90; Mechanical 3 "2" at 89.237,53.141 h1.97 r90; Mechanical 3 "15" at 87.238,72.049 h1.97 r90; Mechanical 3 "16" at 89.237,72.049 h1.97 r90
P1: Mechanical 7 "0.263in/6.68mm" at 45.317,87.153 h0.64 r90; Mechanical 7 "0.195in/4.95mm" at 44.452,88.423 h0.64 r90; Mechanical 7 "0in/0mm" at 46.927,77.945 h0.64 r90; Mechanical 7 "0in/0mm" at 46.927,58.837 h0.64 r90; Mechanical 7 "0.324in/8.23mm" at 30.738,68.223 h0.64 r90; Mechanical 7 "0.241in/6.11mm" at 33.278,68.223 h0.64 r90; Mechanical 7 "0.098in/2.5mm" at 38.993,66.189 h0.64 r90; Mechanical 7 "Alt Padstyle 2: b229_152h76" at 67.514,74.573 h1.27 r90; Mechanical 7 "Alt Padstyle 1: b152_229h76" at 65.609,74.573 h1.27 r90; Mechanical 7 "Right Mtg Padstyle: c152h76" at 63.704,74.573 h1.27 r90; Mechanical 7 "Left Mtg Padstyle: c152h76" at 61.799,74.255 h1.27 r90; Mechanical 7 "3rd Mtg Padstyle: c178h178" at 59.894,74.255 h1.27 r90; Mechanical 7 "2nd Mtg Padstyle: c178h178" at 57.989,74.255 h1.27 r90; Mechanical 7 "1st Mtg Padstyle: r800_109" at 56.084,74.255 h1.27 r90; Mechanical 7 "Default Padstyle: r124_701" at 54.179,74.255 h1.27 r90